# Altium PCB ECE453_PWR.PcbDoc
Units mm, origin at the board's own origin, x right, y up, seen from the top; angles counter-clockwise.
Board outline 41.25 x 71.25 mm, 2 copper layers (Top Layer, Bottom Layer); 34 components, 18 nets, 90 pads, 9 vias.
Unrouted connection lines stored in the file: 68.
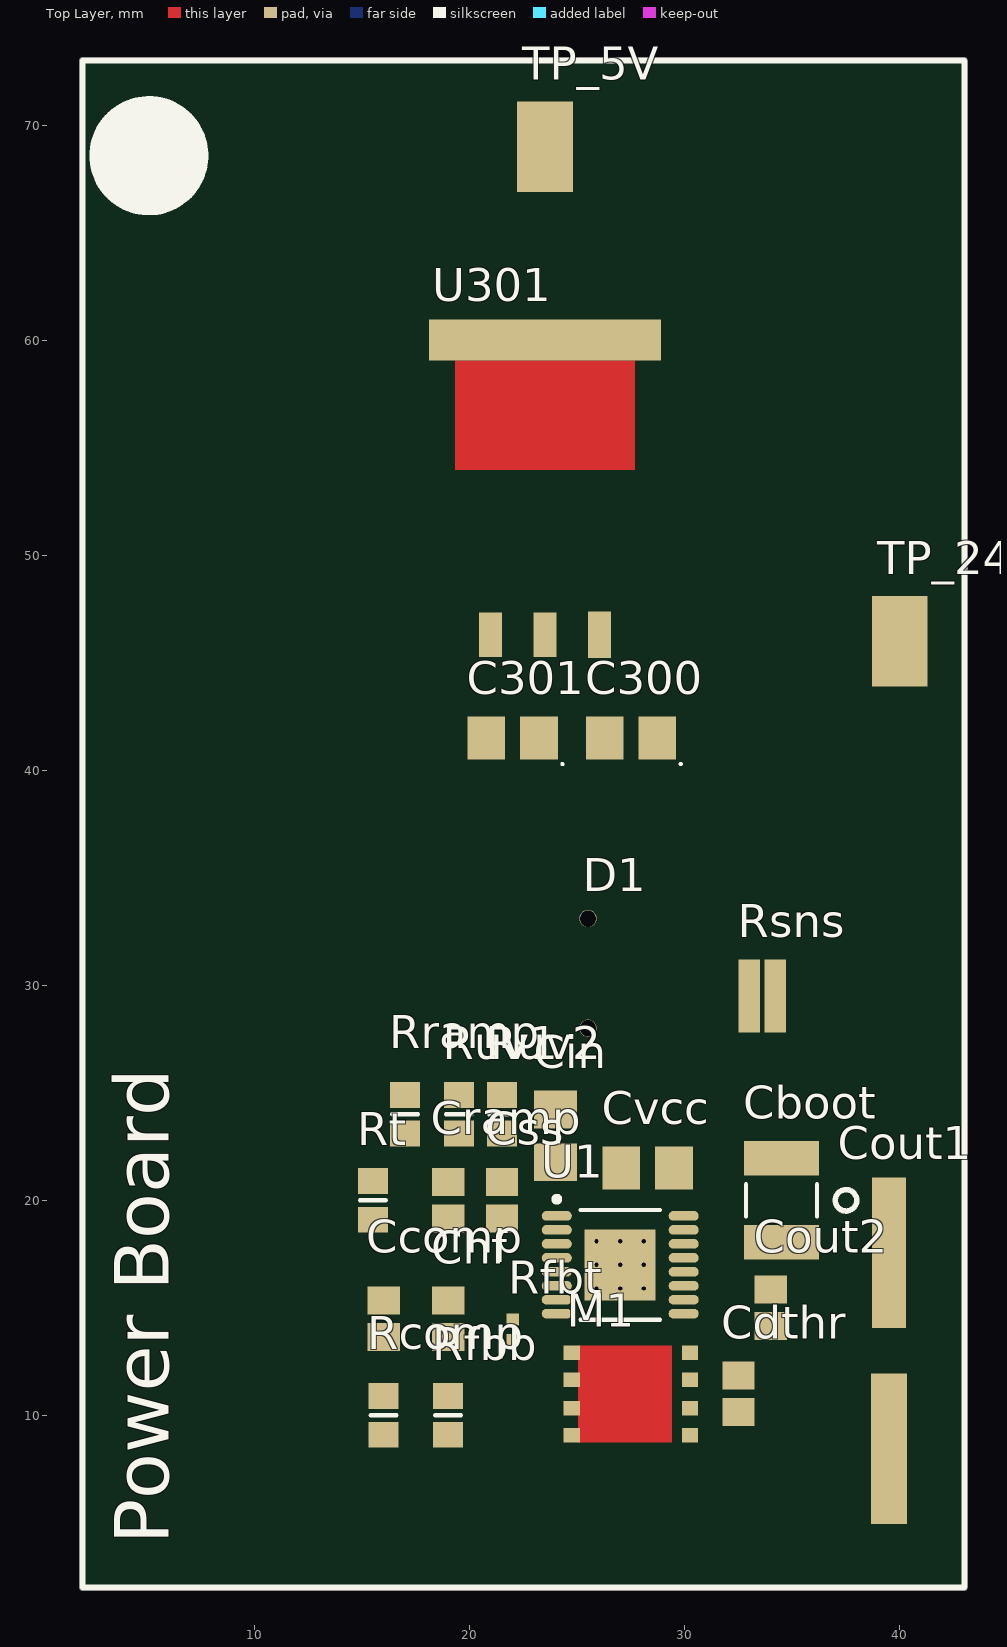
[diagram p0: Top Layer view]
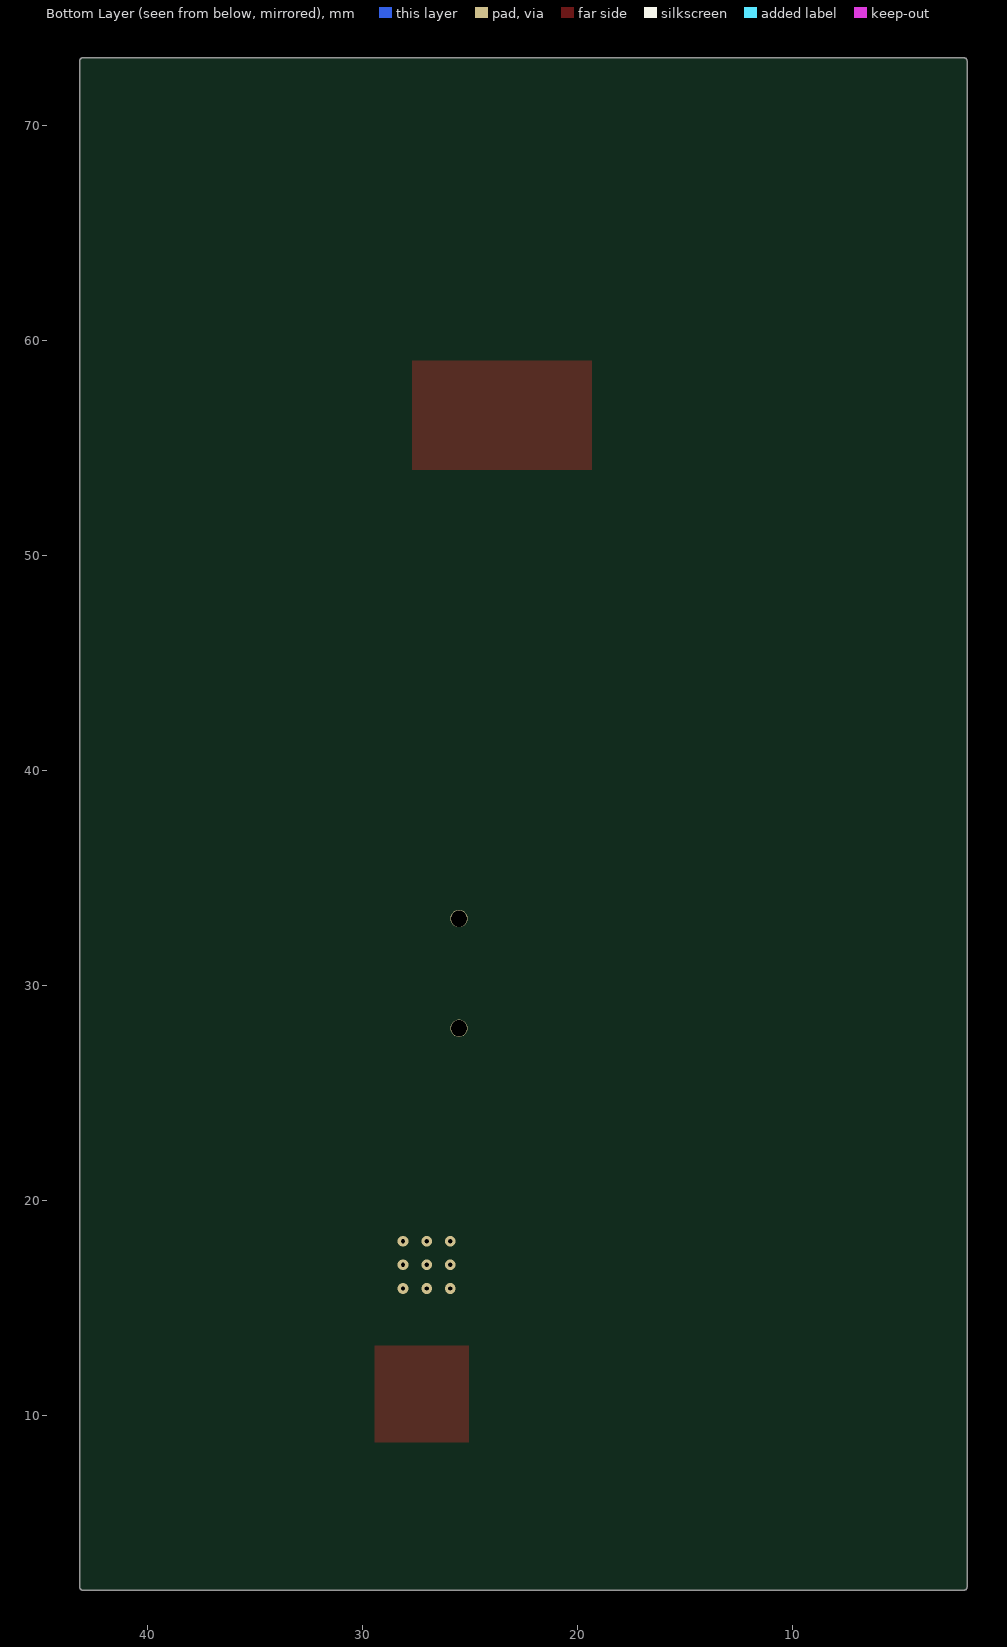
[diagram p1: Bottom Layer view, seen from below]

## Layer stack, top to bottom
Top Solder: solder mask 0.0102, Solder Resist, Dk 3.5
Top Layer: signal copper 0.0356
Dielectric1: dielectric 0.32, FR-4, Dk 4.8
Bottom Layer: signal copper 0.0356
Bottom Solder: solder mask 0.0102, Solder Resist, Dk 3.5

## Board outline
1.873,2 ccw(c2,2) 2,1.873 43,1.873 ccw(c43,2) 43.127,2 43.127,73 ccw(c43,73) 43,73.127 2,73.127 ccw(c2,73) 1.873,73

## Design rules (kind name [scope] priority, off if disabled: settings)
Clearance Polygon_Clearance [All vs InPolygon] p1: gap=0.508 ignorepadtopadclearanceinfootprint=FALSE except(0: Arc-Hole Track-Hole SMDPad-Hole THPad-Hole Via-Hole Fill-Hole Poly-Hole Region-Hole Text-Hole)
Clearance [All] p2: gap=0.2 ignorepadtopadclearanceinfootprint=FALSE except(0: Arc-Hole Track-Hole SMDPad-Hole THPad-Hole Via-Hole Fill-Hole Poly-Hole Region-Hole Text-Hole)
ComponentClearance [InComponent('U3')] p1: gap=0 collisioncheckmode=3 verticalgap=0.254 showdistances=FALSE
Height [All] p1: minheight=0 maxheight=22 prefheight=12.7
HoleSize [All] p1: absolutevalues=TRUE maxlimit=6.35 minlimit=0.03 maxpercent=80.000 minpercent=20.000
MinimumSolderMaskSliver [All] p1: minsoldermaskwidth=0.178
NetAntennae NetAntennae_5.0V [InNet('5.0V')] p1: netantennaetolerance=0
NetAntennae NetAntennae_3.3V [InNet('3.3V')] p2: netantennaetolerance=0
PolygonConnect [IsNamedPolygon('5.0V_L01_P047') vs IsVia] p1: connectstyle=Relief reliefconductorwidth=0.254 reliefentries=4 polygonreliefangle="90 Angle" airgapwidth=0.254
PolygonConnect PolygonConnect_1 [All] p2: connectstyle=Relief reliefconductorwidth=0.254 reliefentries=4 polygonreliefangle="90 Angle" airgapwidth=0.254
RoutingVias [All] p1: holewidth=0.711 width=1.27 viastyle="Through Hole" minholewidth=0.381 minwidth=0.635 maxholewidth=0.711 maxwidth=1.27
SilkToSolderMaskClearance [IsPad] p1: minsilkscreentomaskgap=0.152 clearancetoexposedcopper=TRUE
SolderMaskExpansion [All] p1: expansion=0.102
Width [All] p1: maxlimit=12 minlimit=0.1 preferedwidth=0.254 minimp=50.000000 maximp=50.000000 favimp=50.000000
24 further rules are at their usual default settings.

## Classes and differential pairs
component class "03 24V-5V": C300 C301 J301_5V J302_5V J303_5V TP_5V TP_24V U301

## Components (designator, comment, footprint, x,y, rotation, side; value= is the part's Value field where it differs from the comment)
C300 "CAP_10uF_TANT" CAP_1207_POL 27.5,41.5 r180 top
C301 "CAP_10uF_TANT" CAP_1207_POL 22,41.5 r180 top
Cboot "CAP_27nF" CAP_1812 34.5,20 r270 top value=Value
Ccomp "CAP_1nF" CAP_0805 16,14.5 r90 top value=Value
Cdthr "CAP_100nF" CAP_0805 32.5,11 r270 top value=Value
Chf "CAP_22pF" CAP_0805 19,14.5 r90 top value=Value
Cin "CAP_1uF" CAP_1207 24,23 r90 top value=Value
Cout1 "PCAP_22uF" CAP_RAD_35SVPF22M 39.5,13 r90 top value=Value
Cout2 "CAP_2.2uF" CAP_0805 34,15 r90 top value=Value
Cramp "CAP_620pF" CAP_0805 19,20 r90 top value=Value
Css "CAP_8.2nF" CAP_0805 21.5,20 r90 top
Cvcc "CAP_680nF" CAP_1207 28.275,21.5 r180 top value=Value
D1 "DIO_SCHOTT_1655-1099-ND" DIO_SCHOTT_MBRF10200 25.5,30.55 r90 top
J201_56V "TERMINAL_SCREW_2x1" TERM_2PIN -24.5,-82.5 r90 top
J202_24V "TERMINAL_SCREW_2x1" TERM_2PIN -1,-82.735 r90 top
J203_24V "TERMINAL_SCREW_2x1" TERM_2PIN -16.5,-54.735 r90 top
J204_24V "TERMINAL_SCREW_2x1" TERM_2PIN -2,-54 r90 top
J301_5V "TERMINAL_SCREW_2x1" TERM_2PIN 112,48 r90 top
J302_5V "TERMINAL_SCREW_2x1" TERM_2PIN 88,57.265 r90 top
J303_5V "TERMINAL_SCREW_2x1" TERM_2PIN 62,55.765 r90 top
L1 "IND_10uH" IND_SER2900 80,-62.5 r270 top value=Value
M1 "MOS_CSD19534Q5A" MOS_CSD19534Q5A 27.5,11 r0 top value=Value
Rcomp "RES_56.2K" RES_0805 16,10 r90 top value=Value
Rfbb "RES_1.69K" RES_0805 19,10 r270 top value=Value
Rfbt "RES_32K" RES_0402 22,13.975 r90 top
Rramp "RES_73.2K" RES_0805 17,24 r270 top value=Value
Rsns "RES_8m" RES_1206 33.6,29.5 r0 top value=Value
Rt "RES_10.7K" RES_0805 15.5,20 r90 top value=Value
Ruv1 "RES_1.37K" RES_0805 19.5,24 r90 top value=Value
Ruv2 "RES_49.9K" RES_0805 21.5,24 r270 top value=Value
TP_5V "TP_1206" TP-SMC-1206 23.5,69 r90 top
TP_24V "TP_1206" TP-SMC-1206 40,46 r90 top
U1 "BUCK_LM5088QMHX-1/NOP" BUCK_LM5088 27,17 r0 top value=Value
U301 "BUCK_LM1084IS-5.0" BUCK_5V_OUT_FIXED 23.5,53.33 r270 top

## Footprints (in the part's own frame and the unit in brackets; to place one, negate y for a bottom-side part, rotate by r counter-clockwise, add the part's x,y. Pads: shape width x height; smd on the part's side, far side on the other; paste and mask are expansions set on the pad)
BUCK_5V_OUT_FIXED [mm]
  rect 2.06x1.07 smd: 1(7.025,-2.54) 2(7.025,0)
  rect 1.91x10.8 smd: 2(-6.67,0)
  rect 2.16x1.07 smd: 3(7.025,2.54)
  Top Layer region: -5.715,-4.165 -0.635,-4.165 -0.635,4.165 -5.715,4.165
BUCK_LM5088 [mm] "TSOP, 16-Leads, Body 5.00x4.40mm, Pitch 0.65mm, Thermal Pad 3.30x3.30mm, IPC Medium Density"
  oval 1.4x0.45 smd: 1(-2.95,2.275) 2(-2.95,1.625) 3(-2.95,0.975) 4(-2.95,0.325) 5(-2.95,-0.325) 6(-2.95,-0.975) 7(-2.95,-1.625) 8(-2.95,-2.275) 9(2.95,-2.275) 10(2.95,-1.625) 11(2.95,-0.975) 12(2.95,-0.325) 13(2.95,0.325) 14(2.95,0.975) 15(2.95,1.625) 16(2.95,2.275)
  rect 3.3x3.3 smd: 17(0,0)
  silkscreen extent -3.07,-2.55 1.85,3.17, body extent -2.25,-2.55 2.25,2.55, height 1.2
CAP_0805 [mm]
  rect 1.3x1.5 smd: 1(-0.85,0) 2(0.85,0)
  body extent -1.1,-0.72 1.1,0.72, height 1.1
CAP_1207 [mm] "Chip Capacitor, 2-Leads, Body 3.20x1.70mm, IPC Medium Density"
  rect 1.75x2 smd: 1(-1.225,0) 2(1.225,0)
  body extent -1.75,-1 1.75,1, height 1.6
CAP_1207_POL [mm] "Chip Capacitor, 2-Leads, Body 3.20x1.70mm, IPC Medium Density"
  rect 1.75x2 smd: 1(-1.225,0) 2(1.225,0)
  silkscreen extent -2.36,1.16 -2.26,1.26, body extent -1.75,-1 1.75,1, height 1.6
CAP_1812 [mm] "Chip Capacitor, 2-Leads, Body 4.50x3.20mm, IPC Medium Density"
  rect 1.6x3.5 smd: 1(-1.95,0) 2(1.95,0)
  silkscreen extent -0.75,-1.65 0.75,1.65, body extent -2.4,-1.75 2.4,1.75, height 1.1
CAP_RAD_35SVPF22M [mm]
  rect 7x1.6 smd: 1(4.55,0)
  rect 7x1.66 smd: 2(-4.55,0)
  silkscreen extent 6.5,1.5 7.5,2.5
DIO_SCHOTT_MBRF10200 [mm]
  round 0.8 hole 0.762: 1(-2.55,0) 2(2.55,0)
IND_SER2900 [mm]
  rect 5.33x5.59 smd: 1(-5.075,-14.355)
  rect 5.59x5.33 smd: 2(5.075,-14.355)
  rect 6.35x5.28 smd: 3(0,7.72)
MOS_CSD19534Q5A [mm]
  rect 0.75x0.675 smd: 1(2.753,-1.918) 2(2.753,-0.66) 3(2.753,0.66) 4(2.753,1.918) 5(-2.753,1.918) 6(-2.753,0.66) 7(-2.753,-0.66) 8(-2.753,-1.918)
  Top Layer region: -2.473,-2.255 1.918,-2.255 1.918,2.255 -2.473,2.255
RES_0402 [mm] "Chip Resistor, 2-Leads, Body 1.02x0.52mm, IPC Medium Density"
  rect 0.55x0.6 smd: 1(-0.475,0) 2(0.475,0)
  body extent -0.53,-0.28 0.53,0.27, height 0.4
RES_0805 [mm] "Chip Resistor, Body 2.0x1.3mm, IPC Medium Density"
  rect 1.2x1.4 smd: 1(-0.9,0) 2(0.9,0)
  silkscreen extent 0,-0.6 0,0.6, body extent -1.07,-0.7 1.07,0.7, height 0.65
RES_1206 [mm] "Chip Resistor, 2-Leads, Body 1.60x3.20mm, IPC Medium Density"
  rect 1x3.4 smd: 1(-0.6,0) 2(0.6,0)
  body extent -0.9,-1.7 0.9,1.7, height 0.6
TERM_2PIN [mm]
  round 0.9 hole 0.762: 1(4.765,0) 2(-4.765,0)
TP-SMC-1206 [mm] "Surface mount test point 1206"
  rect 4.2x2.6 smd mask+0: 1(0,0)
  body extent -1.57,-0.79 1.63,0.81, height 1.22

## Part data
C300 C301: Capacitance=10uF, ESR (Equivalent Series Resistance)="2 Ohm", Lifetime @ Temp.=-, Manufacturer="AVX Corporation", Manufacturer Part Number=F951E106MAAAQ2, Manufacturer Size Code=A, Operating Temperature="-55°C ~ 125°C", Package / Case="1206 (3216 Metric)", Supplier Part Number 1=478-8496-1-ND, Tolerance=±20%, Category=Capacitors, ComponentLink1Description=http://datasheets.avx.com/F95.pdf, ComponentLink1URL=http://datasheets.avx.com/F95.pdf, Failure Rate=-, Features="General Purpose", Height - Seated (Max)="0.063\" (1.60mm)", Lead Spacing=-, Mounting Type="Surface Mount", Notification="Current market demand for these product types have resulted in fluctuating and extending lead times. Lead times may differ.", Packaging="Cut Tape (CT)", Part Status=Active, Pricing 1="1=1.01, 10=0.766, 100=0.5477, 500=0.42406, 1000=0.36516 (USD)", RoHS="RoHS Compliant", Size / Dimension="0.126\" L x 0.067\" W (3.20mm x 1.70mm)", Stock 1=23690, Supplier 1=Digi-Key, TYPE="Conformal Coated"
Cboot: "Imported", Capacitance=27nF, Manufacturer=KEMET, Manufacturer_Name=Kemet, Manufacturer_Part_Number=C1812C273J5GACTU, Operating Temperature="-55°C ~ 125°C", Package / Case="1812 (4532 Metric)", Ratings=-, Supplier Part Number 1=399-5352-1-ND, Temperature Coefficient="C0G, NP0", Tolerance=±5%, Voltage - Rated=50V, Applications="General Purpose", Category=Capacitors, ComponentLink1Description=https://search.kemet.com/component-edge/download/datasheet/C1812C273J5GACTU.pdf, ComponentLink1URL=https://search.kemet.com/component-edge/download/datasheet/C1812C273J5GACTU.pdf, Failure Rate=-, Features="Low ESL", Height - Seated (Max)=-, Lead Spacing=-, Lead Style=-, Manufacturer Part Number=C1812C273J5GACTU, Mounting Type="Surface Mount, MLCC", Notification="Current market demand for these product types have resulted in fluctuating and extending lead times. Lead times may differ.", Packaging="Cut Tape (CT)", Part Status=Active, Pricing 1="1=1.94, 10=1.533, 100=1.1499, 500=0.8688 (USD)", RefDes=RefDes, RoHS="RoHS Compliant", Size / Dimension="0.177\" L x 0.126\" W (4.50mm x 3.20mm)", Stock 1=1884, Supplier 1=Digi-Key, Thickness (Max)="0.043\" (1.10mm)", TYPE=TYPE, Vendor=Kemet
Ccomp: "Imported", Capacitance=1nF, Manufacturer=KEMET, Manufacturer_Name=Kemet, Manufacturer_Part_Number=C0805C102K5GACTU, Operating Temperature="-55°C ~ 125°C", Package / Case="0805 (2012 Metric)", Ratings=-, Supplier Part Number 1=399-7988-1-ND, Temperature Coefficient="C0G, NP0", Tolerance=±10%, Voltage - Rated=50V, Applications="General Purpose", Category=Capacitors, ComponentLink1Description=https://search.kemet.com/component-edge/download/datasheet/C0805C102K5GACTU.pdf, ComponentLink1URL=https://search.kemet.com/component-edge/download/datasheet/C0805C102K5GACTU.pdf, Failure Rate=-, Features="Low ESL", Height - Seated (Max)=-, Lead Spacing=-, Lead Style=-, Manufacturer Part Number=C0805C102K5GACTU, Mounting Type="Surface Mount, MLCC", Notification="Current market demand for these product types have resulted in fluctuating and extending lead times. Lead times may differ.", Packaging="Cut Tape (CT)", Part Status=Active, Pricing 1="1=0.13, 10=0.09, 100=0.0424, 500=0.02972, 1000=0.02461 (USD)", RefDes=RefDes, RoHS="RoHS Compliant", Size / Dimension="0.079\" L x 0.049\" W (2.00mm x 1.25mm)", Stock 1=31421, Supplier 1=Digi-Key, Thickness (Max)="0.035\" (0.88mm)", TYPE=TYPE, Vendor=Kemet
Cdthr: "Imported", Capacitance=100nF, Manufacturer="AVX Corporation", Manufacturer_Name=AVX, Manufacturer_Part_Number=08053C104JAZ2A, Operating Temperature="-55°C ~ 125°C", Package / Case="0805 (2012 Metric)", Ratings=-, Supplier Part Number 1=08053C104JAZ2A-ND, Temperature Coefficient=X7R, Tolerance=±5%, Voltage - Rated=25V, Applications="Boardflex Sensitive", Category=Capacitors, ComponentLink1Description=http://datasheets.avx.com/FlexitermMLCC.pdf, ComponentLink1URL=http://datasheets.avx.com/FlexitermMLCC.pdf, Features="Soft Termination", Height - Seated (Max)=-, Lead Spacing=-, Lead Style=-, Manufacturer Part Number=08053C104JAZ2A, Mounting Type="Surface Mount, MLCC", Notification="Current market demand for these product types have resulted in fluctuating and extending lead times. Lead times may differ.", Packaging="Tape & Reel (TR)", Part Status=Active, Pricing 1="4000=0.0864 (USD)", RefDes=RefDes, RoHS="RoHS Compliant", Size / Dimension="0.079\" L x 0.049\" W (2.01mm x 1.25mm)", Stock 1=0, Supplier 1=Digi-Key, Thickness (Max)="0.037\" (0.94mm)", TYPE=TYPE, Vendor=AVX
Chf: "Imported", Capacitance=22pF, Manufacturer=KEMET, Manufacturer_Name=Kemet, Manufacturer_Part_Number=C0805C220K3GACTU, Operating Temperature="-55°C ~ 125°C", Package / Case="0805 (2012 Metric)", Ratings=-, Supplier Part Number 1=399-9190-1-ND, Temperature Coefficient="C0G, NP0", Tolerance=±10%, Voltage - Rated=25V, Applications="General Purpose", Category=Capacitors, ComponentLink1Description=https://search.kemet.com/component-edge/download/datasheet/C0805C220K3GACTU.pdf, ComponentLink1URL=https://search.kemet.com/component-edge/download/datasheet/C0805C220K3GACTU.pdf, Failure Rate=-, Features="Low ESL", Height - Seated (Max)=-, Lead Spacing=-, Lead Style=-, Manufacturer Part Number=C0805C220K3GACTU, Mounting Type="Surface Mount, MLCC", Notification="Current market demand for these product types have resulted in fluctuating and extending lead times. Lead times may differ.", Packaging="Cut Tape (CT)", Part Status=Active, Pricing 1="1=0.1, 10=0.072, 100=0.0322, 500=0.02302, 1000=0.01809 (USD)", RefDes=RefDes, RoHS="RoHS Compliant", Size / Dimension="0.079\" L x 0.049\" W (2.00mm x 1.25mm)", Stock 1=86290, Supplier 1=Digi-Key, Thickness (Max)="0.035\" (0.88mm)", TYPE=TYPE, Vendor=Kemet
Cin: "Imported", Capacitance=1uF, Manufacturer="TDK Corporation", Manufacturer_Name=TDK, Manufacturer_Part_Number=C3216X7R2A105K160AA, Operating Temperature="-55°C ~ 125°C", Package / Case="1206 (3216 Metric)", Ratings=-, Supplier Part Number 1=445-4467-1-ND, Temperature Coefficient=X7R, Tolerance=±10%, Voltage - Rated=100V, Applications="General Purpose", Category=Capacitors, ComponentLink1Description=https://product.tdk.com/info/en/catalog/datasheets/mlcc_commercial_midvoltage_en.pdf, ComponentLink1URL=https://product.tdk.com/info/en/catalog/datasheets/mlcc_commercial_midvoltage_en.pdf, Failure Rate=-, Features=-, Height - Seated (Max)=-, Lead Spacing=-, Lead Style=-, Manufacturer Part Number=C3216X7R2A105K160AA, Mounting Type="Surface Mount, MLCC", Notification="Current market demand for these product types have resulted in fluctuating and extending lead times. Lead times may differ.", Packaging="Cut Tape (CT)", Part Status=Active, Pricing 1="1=0.45, 10=0.316, 100=0.2083, 500=0.15434, 1000=0.13118 (USD)", RefDes=RefDes, RoHS="RoHS Compliant", Size / Dimension="0.126\" L x 0.063\" W (3.20mm x 1.60mm)", Stock 1=15982, Supplier 1=Digi-Key, Thickness (Max)="0.051\" (1.30mm)", TYPE=TYPE, Vendor=TDK
Cout1: "Imported", Capacitance=22uF, ESR (Equivalent Series Resistance)="35 mOhm", Lifetime @ Temp.="5000 Hrs @ 105°C", Manufacturer="Panasonic Electronic Components", Manufacturer_Name=Panasonic, Manufacturer_Part_Number=35SVPF22M, Operating Temperature="-55°C ~ 105°C", Package / Case="Radial, Can - SMD", Ratings=-, Supplier Part Number 1=P16560CT-ND, Tolerance=±20%, Applications="General Purpose", Category=Capacitors, ComponentLink1Description=http://industrial.panasonic.com/www-cgi/jvcr13pz.cgi?E+CI+4+AAB8001+35SVPF22M+8+WW, ComponentLink1URL=http://industrial.panasonic.com/www-cgi/jvcr13pz.cgi?E+CI+4+AAB8001+35SVPF22M+8+WW, Height - Seated (Max)="0.236\" (6.00mm)", Lead Spacing=-, Manufacturer Part Number=35SVPF22M, Mounting Type="Surface Mount", Packaging="Cut Tape (CT)", Part Status=Active, Pricing 1="1=1.32, 10=1.041, 100=0.7811, 500=0.59018 (USD)", RefDes=RefDes, RoHS="RoHS Compliant", Size / Dimension="0.248\" Dia (6.30mm)", Stock 1=16325, Supplier 1=Digi-Key, Surface Mount Land Size="0.260\" L x 0.260\" W (6.60mm x 6.60mm)", TYPE=TYPE, Vendor=Panasonic
Cout2: "Imported", Capacitance=2.2uF, Manufacturer="TDK Corporation", Manufacturer_Name=TDK, Manufacturer_Part_Number=C2012X7R1H225K125AC, Operating Temperature="-55°C ~ 125°C", Package / Case="0805 (2012 Metric)", Ratings=-, Supplier Part Number 1=445-5968-1-ND, Temperature Coefficient=X7R, Tolerance=±10%, Voltage - Rated=50V, Applications="General Purpose", Category=Capacitors, ComponentLink1Description=https://product.tdk.com/info/en/catalog/datasheets/mlcc_commercial_general_en.pdf, ComponentLink1URL=https://product.tdk.com/info/en/catalog/datasheets/mlcc_commercial_general_en.pdf, Failure Rate=-, Features="Low ESL", Height - Seated (Max)=-, Lead Spacing=-, Lead Style=-, Manufacturer Part Number=C2012X7R1H225K125AC, Mounting Type="Surface Mount, MLCC", Notification="Current market demand for these product types have resulted in fluctuating and extending lead times. Lead times may differ.", Packaging="Cut Tape (CT)", Part Status=Active, Pricing 1="1=0.51, 10=0.351, 100=0.2107, 500=0.158, 1000=0.13343 (USD)", RefDes=RefDes, RoHS="RoHS Compliant", Size / Dimension="0.079\" L x 0.049\" W (2.00mm x 1.25mm)", Stock 1=64990, Supplier 1=Digi-Key, Thickness (Max)="0.057\" (1.45mm)", TYPE=TYPE, Vendor=TDK
Cramp: "Imported", Capacitance=620pF, Manufacturer="Samsung Electro-Mechanics", Manufacturer_Part_Number=CL21C621JBCNNNC, Operating Temperature="-55°C ~ 125°C", Package / Case="0805 (2012 Metric)", Ratings=-, Supplier Part Number 1=1276-2677-1-ND, Temperature Coefficient="C0G, NP0", Tolerance=±5%, Voltage - Rated=50V, Applications="General Purpose", Category=Capacitors, ComponentLink1Description=http://www.samsungsem.com/kr/support/product-search/mlcc/CL21C621JBCNNNC.jsp, ComponentLink1URL=http://www.samsungsem.com/kr/support/product-search/mlcc/CL21C621JBCNNNC.jsp, Features=-, Height - Seated (Max)=-, Lead Spacing=-, Lead Style=-, Manufacturer_Name="Samsung Electro-Mechanics", Manufacturer Part Number=CL21C621JBCNNNC, Mounting Type="Surface Mount, MLCC", Notification="Current market demand for these product types have resulted in fluctuating and extending lead times. Lead times may differ.", Packaging="Cut Tape (CT)", Part Status=Active, Pricing 1="1=0.1, 10=0.066, 100=0.0293, 500=0.0209, 1000=0.01643 (USD)", RefDes=RefDes, RoHS="RoHS Compliant", Size / Dimension="0.079\" L x 0.049\" W (2.00mm x 1.25mm)", Stock 1=14370, Supplier 1=Digi-Key, Thickness (Max)="0.037\" (0.95mm)", TYPE=TYPE, Vendor="Samsung Electro-Mechanics"
Css: "Imported", Capacitance=8.2nF, Manufacturer="Murata Electronics North America", Manufacturer Part Number=GRM2195C1H822JA01D, Operating Temperature="-55°C ~ 125°C", Package / Case="0805 (2012 Metric)", Ratings=-, Supplier Part Number 1=490-1640-1-ND, Temperature Coefficient="C0G, NP0", Tolerance=±5%, Voltage - Rated=50V, Applications="General Purpose", Category=Capacitors, ComponentLink1Description=https://www.murata.com/~/media/webrenewal/support/library/catalog/products/capacitor/mlcc/c02e.ashx, ComponentLink1URL=https://www.murata.com/~/media/webrenewal/support/library/catalog/products/capacitor/mlcc/c02e.ashx, Features=-, Height - Seated (Max)=-, Lead Spacing=-, Lead Style=-, Mounting Type="Surface Mount, MLCC", Notification="Current market demand for these product types have resulted in fluctuating and extending lead times. Lead times may differ.", Packaging="Cut Tape (CT)", Part Status=Active, Pricing 1="1=0.24, 10=0.167, 100=0.0948, 500=0.06696, 1000=0.05858 (USD)", RoHS="RoHS Compliant", Size / Dimension="0.079\" L x 0.049\" W (2.00mm x 1.25mm)", Stock 1=52724, Supplier 1=Digi-Key, Thickness (Max)="0.037\" (0.95mm)"
Cvcc: "Imported", Capacitance=680nF, Dielectric Material="Acrylic, Metallized - Stacked", Manufacturer="Panasonic Electronic Components", Manufacturer_Name=Panasonic, Manufacturer_Part_Number=ECPU1C684MA5, Manufacturer Part Number=ECP-U1C684MA5, Operating Temperature="-40°C ~ 85°C", Package / Case="1206 (3216 Metric)", Ratings=-, Supplier Part Number 1=PCF1131CT-ND, Tolerance=±20%, Voltage Rating - DC=16V, Applications="EMI, RFI Suppression", Category=Capacitors, ComponentLink1Description=http://industrial.panasonic.com/www-cgi/jvcr13pz.cgi?E+PZ+3+ABD0012+ECPU1C684MA5+7+WW, ComponentLink1URL=http://industrial.panasonic.com/www-cgi/jvcr13pz.cgi?E+PZ+3+ABD0012+ECPU1C684MA5+7+WW, Features="Low ESR", Height - Seated (Max)="0.063\" (1.60mm)", Lead Spacing=-, Mounting Type="Surface Mount", Packaging="Cut Tape (CT)", Part Status=Active, Pricing 1="1=0.81, 10=0.599, 100=0.4104, 500=0.32492, 1000=0.27362 (USD)", RefDes=RefDes, RoHS="RoHS Compliant", Size / Dimension="0.126\" L x 0.063\" W (3.20mm x 1.60mm)", Stock 1=39663, Supplier 1=Digi-Key, Termination="Solder Pads", TYPE=TYPE, Vendor=Panasonic, Voltage Rating - AC=-
D1: "Imported", Capacitance @ Vr, F=-, Current - Average Rectified (Io)=10A, Manufacturer="SMC Diode Solutions", Manufacturer Part Number=MBRF10200, Operating Temperature - Junction="-55°C ~ 175°C", Package / Case="TO-220-2 Insulated, TO-220AC", Supplier Device Package=ITO-220AC, Supplier Part Number 1=1655-1099-ND, Category="Discrete Semiconductor Products", ComponentLink1Description=http://www.smc-diodes.com/propdf/MBRF10200%20N0838%20REV.B.pdf, ComponentLink1URL=http://www.smc-diodes.com/propdf/MBRF10200%20N0838%20REV.B.pdf, Diode Type=Schottky, Mounting Type="Through Hole", Packaging=Tube, Part Status=Active, Pricing 1="1=0.62, 10=0.524, 25=0.4584, 100=0.3928, 250=0.34044, 500=0.28806, 1000=0.22259, 2500=0.20295, 5000=0.18986 (USD)", RoHS="RoHS Compliant", Speed="Fast Recovery =< 500ns, > 200mA (Io)", Stock 1=0, Supplier 1=Digi-Key
J201_56V J202_24V J203_24V J204_24V J301_5V J302_5V J303_5V: "TERM BLOCK PLUG 2POS STR 5.08MM", Color=Green, Current - IEC=20A, Manufacturer="On Shore Technology Inc.", Manufacturer Part Number=OSTTJ025153, Material Flammability Rating="UL94 V-0", Operating Temperature="-30°C ~ 105°C", Supplier Part Number 1=WM13946-ND, Category="Connectors, Interconnects", Clamp Material - Plating="Copper - Nickel Plated", ComponentLink1Description=http://www.on-shore.com/wp-content/uploads/2015/09/osttjxx5153.pdf, ComponentLink1URL=http://www.on-shore.com/wp-content/uploads/2015/09/osttjxx5153.pdf, ComponentLink2Description=http://www.molex.com/pdm_docs/sd/393900102_sd.pdf, ComponentLink2URL=http://www.molex.com/pdm_docs/sd/393900102_sd.pdf, Contact Material=Brass, Contact Material - Plating="Copper - Tin Plated", Contact Mating Finish=Tin, Contact Tail Length=-, Features="Retention Latches (Non-Wire Side)", Header Orientation=-, Housing Material=Brass, Ingress Protection=-, Insulation Height=-, Mating Orientation="Horizontal with Board", Mounting Type=Screw, Number of Levels=1, Number of Positions=2, Packaging=Bulk, Part Status=Active, Pitch="0.200\" (5.08mm)", Plug Wire Entry=-, Positions Per Level=2, Pricing 1="1=1.52, 10=1.068, 25=0.996, 50=0.904, 100=0.9, 250=0.76, 500=0.72, 1000=0.64, 5000=0.52 (USD)", RoHS="RoHS Compliant", Screw Material - Plating="Copper - Nickel Plated", Screw Size=-, Screw Thread=-, Stock 1=1303, Supplier 1=Digi-Key, Termination Style=Screw, Torque - Screw="0.56 Nm (5.0 Lb-In)", TYPE="Plug, Female Sockets", Wire Gauge="10-30 AWG", Wire Gauge or Range - AWG="12-24 AWG", Wire Gauge or Range - mm²=0.34-2.5mm², Wire Strip Length=7-8mm, Wire Termination=Screw
L1: "Imported", DC Resistance Max=1650, Inductance=10uH, Inductance Tolerance="± 10%", Inductor Construction=Shielded, Manufacturer=COILCRAFT, Manufacturer_Name=Coilcraft, Manufacturer_Part_Number=SER2915L-103KL, Power Inductor Case="27.9mm x 19.8mm x 15.36", RMS Current (Irms)=30, Saturation Current (Isat)=13, Self Resonant Frequency Min="20MHz<!--FANDB--><div class=\"features-and-benefits-container\"><div class=\"features-and-benefits-description\"><span class=\"features-benefits-value\">The SER2915L-103KL is a surface mount shielded Power Inductor with ferrite core. This inductor features tin-silver over copper terminations and is resistance to soldering heat maximum three 40 seconds reflows at +260°C, parts cooled to room temperature between cycles. This inductor also features moisture sensitivity level (MSL) of 1, failures in time (FIT)/mean time between failures (MTBF) is 38 per billion hours/26,315,789 hours, calculated per Telcordia SR-332 and tested with pure water or alcohol only foe wash. Peak dc current at which the inductance drops the specified amount from its value without current and inductance measured at 500kHz, 0.1Vrms, 0ADC on an Agilent/HP 4284", Supplier Part Number 1=2288908, Automotive Qualification Standard=AEC-Q200, ComponentLink1Description=http://www.farnell.com/datasheets/1681984.pdf, ComponentLink1URL=http://www.farnell.com/datasheets/1681984.pdf, Manufacturer Part Number=SER2915L-103KL, Packaging=Each, Product Range="SER2900 Series", RefDes=RefDes, RoHS=YES, Supplier 1=Farnell, SVHC="No SVHC (12-Jan-2017)", TYPE=TYPE, Vendor=Coilcraft
M1: "Imported", Current - Continuous Drain (Id) @ 25°C="50A (Ta)", Drive Voltage (Max Rds On,  Min Rds On)="6V, 10V", Manufacturer="Texas Instruments", Manufacturer_Part_Number=CSD19534Q5A, Operating Temperature="-55°C ~ 150°C (TJ)", Package / Case=8-PowerTDFN, Power Dissipation (Max)="3.2W (Ta), 63W (Tc)", Supplier Device Package="8-VSON (5x6)", Supplier Part Number 1=296-43636-1-ND, Category="Discrete Semiconductor Products", ComponentLink1Description=http://www.ti.com/lit/ds/symlink/csd19534q5a.pdf, ComponentLink1URL=http://www.ti.com/lit/ds/symlink/csd19534q5a.pdf, Datasheet_URL=http://www.ti.com/lit/ds/symlink/CSD19534Q5A.pdf, FET Feature=-, FET Type=N-Channel, IdsMax=10.0A, Manufacturer_Name="Texas Instruments", Manufacturer Part Number=CSD19534Q5A, Mounting Type="Surface Mount", Packaging="Cut Tape (CT)", Part Status=Active, Pricing 1="1=1.18, 10=1.043, 100=0.8244, 500=0.63936, 1000=0.50475 (USD)", QgTyp=17nC, Quantity=1, Rds On (Max) @ Id, Vgs="15.1 mOhm @ 10A, 10V", Rdsonat10V=0.012Ohm, RefDes=RefDes, RoHS="RoHS Compliant", Stock 1=307, Supplier 1=Digi-Key, Technology="MOSFET (Metal Oxide)", TYPE=TYPE, VdsMax=100.0V, Vendor="Texas Instruments", Vgs (Max)=±20V, Vgs(th) (Max) @ Id="3.4V @ 250µA"
Rcomp: "Imported", Manufacturer="Panasonic Electronic Components", Manufacturer_Name=Panasonic, Manufacturer_Part_Number=ERJ-6ENF5622V, Operating Temperature="-55°C ~ 155°C", Package / Case="0805 (2012 Metric)", Power (Watts)="0.125W, 1/8W", Supplier Device Package=0805, Supplier Part Number 1=P56.2KCCT-ND, Temperature Coefficient=±100ppm/°C, Tolerance=±1%, Category=Resistors, ComponentLink1Description=https://industrial.panasonic.com/cdbs/www-data/pdf/RDA0000/AOA0000C304.pdf, ComponentLink1URL=https://industrial.panasonic.com/cdbs/www-data/pdf/RDA0000/AOA0000C304.pdf, Composition="Thick Film", Failure Rate=-, Features="Automotive AEC-Q200", Height - Seated (Max)="0.028\" (0.70mm)", Manufacturer Part Number=ERJ-6ENF5622V, Packaging="Cut Tape (CT)", Part Status=Active, Pricing 1="1=0.1, 10=0.079, 100=0.0305, 1000=0.0134, 2500=0.01157 (USD)", RefDes=RefDes, RoHS="RoHS Compliant", Size / Dimension="0.079\" L x 0.049\" W (2.00mm x 1.25mm)", Stock 1=45392, Supplier 1=Digi-Key, TYPE=TYPE, Vendor=Panasonic
Rfbb: "Imported", Manufacturer="Panasonic Electronic Components", Manufacturer_Name=Panasonic, Manufacturer_Part_Number=ERJ-6ENF1691V, Operating Temperature="-55°C ~ 155°C", Package / Case="0805 (2012 Metric)", Power (Watts)="0.125W, 1/8W", Resistance=1.69K, Supplier Device Package=0805, Supplier Part Number 1=P1.69KCCT-ND, Temperature Coefficient=±100ppm/°C, Tolerance=±1%, Category=Resistors, ComponentLink1Description=https://industrial.panasonic.com/cdbs/www-data/pdf/RDA0000/AOA0000C304.pdf, ComponentLink1URL=https://industrial.panasonic.com/cdbs/www-data/pdf/RDA0000/AOA0000C304.pdf, Composition="Thick Film", Failure Rate=-, Features="Automotive AEC-Q200", Height - Seated (Max)="0.028\" (0.70mm)", Manufacturer Part Number=ERJ-6ENF1691V, Packaging="Cut Tape (CT)", Part Status=Active, Pricing 1="1=0.1, 10=0.079, 100=0.0305, 1000=0.0134, 2500=0.01157 (USD)", RefDes=RefDes, RoHS="RoHS Compliant", Size / Dimension="0.079\" L x 0.049\" W (2.00mm x 1.25mm)", Stock 1=49948, Supplier 1=Digi-Key, TYPE=TYPE, Vendor=Panasonic
Rfbt: "Imported", Manufacturer="Vishay Dale", Manufacturer Part Number=TNPW040232K0BEED, Operating Temperature="-55°C ~ 155°C", Package / Case="0402 (1005 Metric)", Power (Watts)="0.1W, 1/10W", Supplier Device Package=0402, Supplier Part Number 1=541-2115-1-ND, Temperature Coefficient=±25ppm/°C, Tolerance=±0.1%, Category=Resistors, ComponentLink1Description=http://www.vishay.com/docs/28758/tnpw_e3.pdf, ComponentLink1URL=http://www.vishay.com/docs/28758/tnpw_e3.pdf, Composition="Thin Film", Failure Rate=-, Features="Anti-Sulfur, Automotive AEC-Q200, Moisture Resistant", Height - Seated (Max)="0.016\" (0.40mm)", Packaging="Cut Tape (CT)", Part Status=Active, Pricing 1="1=0.65, 10=0.462, 100=0.2402, 1000=0.12936, 2500=0.1276 (USD)", RoHS="RoHS Compliant", Size / Dimension="0.039\" L x 0.020\" W (1.00mm x 0.50mm)", Stock 1=593, Supplier 1=Digi-Key
Rramp: "Imported", Manufacturer="Panasonic Electronic Components", Manufacturer_Name=Panasonic, Manufacturer_Part_Number=ERJ-6ENF7322V, Operating Temperature="-55°C ~ 155°C", Package / Case="0805 (2012 Metric)", Power (Watts)="0.125W, 1/8W", Supplier Device Package=0805, Supplier Part Number 1=P73.2KCCT-ND, Temperature Coefficient=±100ppm/°C, Tolerance=±1%, Category=Resistors, ComponentLink1Description=https://industrial.panasonic.com/cdbs/www-data/pdf/RDA0000/AOA0000C304.pdf, ComponentLink1URL=https://industrial.panasonic.com/cdbs/www-data/pdf/RDA0000/AOA0000C304.pdf, Composition="Thick Film", Failure Rate=-, Features="Automotive AEC-Q200", Height - Seated (Max)="0.028\" (0.70mm)", Manufacturer Part Number=ERJ-6ENF7322V, Packaging="Cut Tape (CT)", Part Status=Active, Pricing 1="1=0.1, 10=0.079, 100=0.0305, 1000=0.0134, 2500=0.01157 (USD)", RefDes=RefDes, RoHS="RoHS Compliant", Size / Dimension="0.079\" L x 0.049\" W (2.00mm x 1.25mm)", Stock 1=3056, Supplier 1=Digi-Key, TYPE=TYPE, Vendor=Panasonic
Rsns: "Imported", Manufacturer=Susumu, Manufacturer_Name="Susumu Co Ltd", Manufacturer_Part_Number=PRL1632-R008-F-T1, Operating Temperature="-55°C ~ 125°C", Package / Case="Wide 1206 (3216 Metric), 0612", Power (Watts)=1W, Supplier Device Package=1206, Supplier Part Number 1=PRL1632.008FCT-ND, Temperature Coefficient="0/ +350ppm/°C", Tolerance=±1%, Category=Resistors, ComponentLink1Description=http://www.susumu.co.jp/common/pdf/n_catalog_partition07_en.pdf, ComponentLink1URL=http://www.susumu.co.jp/common/pdf/n_catalog_partition07_en.pdf, Composition="Thin Film", Failure Rate=-, Features="Current Sense", Height - Seated (Max)="0.024\" (0.60mm)", Manufacturer Part Number=PRL1632-R008-F-T1, Packaging="Cut Tape (CT)", Part Status=Active, Pricing 1="1=0.65, 10=0.546, 25=0.4676, 50=0.421, 100=0.3664, 250=0.32744, 500=0.26508 (USD)", RefDes=RefDes, RoHS="RoHS Compliant", Size / Dimension="0.063\" L x 0.126\" W (1.60mm x 3.20mm)", Stock 1=11692, Supplier 1=Digi-Key, TYPE=TYPE, Vendor="Susumu Co Ltd"
Rt: "Imported", Manufacturer="Panasonic Electronic Components", Manufacturer_Name=Panasonic, Manufacturer_Part_Number=ERJ-6ENF1072V, Operating Temperature="-55°C ~ 155°C", Package / Case="0805 (2012 Metric)", Power (Watts)="0.125W, 1/8W", Supplier Device Package=0805, Supplier Part Number 1=P10.7KCCT-ND, Temperature Coefficient=±100ppm/°C, Tolerance=±1%, Category=Resistors, ComponentLink1Description=https://industrial.panasonic.com/cdbs/www-data/pdf/RDA0000/AOA0000C304.pdf, ComponentLink1URL=https://industrial.panasonic.com/cdbs/www-data/pdf/RDA0000/AOA0000C304.pdf, Composition="Thick Film", Failure Rate=-, Features="Automotive AEC-Q200", Height - Seated (Max)="0.028\" (0.70mm)", Manufacturer Part Number=ERJ-6ENF1072V, Packaging="Cut Tape (CT)", Part Status=Active, Pricing 1="1=0.1, 10=0.079, 100=0.0305, 1000=0.0134, 2500=0.01157 (USD)", RefDes=RefDes, RoHS="RoHS Compliant", Size / Dimension="0.079\" L x 0.049\" W (2.00mm x 1.25mm)", Stock 1=71566, Supplier 1=Digi-Key, TYPE=TYPE, Vendor=Panasonic
Ruv1: "Imported", Manufacturer="Vishay Dale", Manufacturer_Name=Vishay-Dale, Manufacturer_Part_Number=CRCW08051K37FKEA, Operating Temperature="-55°C ~ 155°C", Package / Case="0805 (2012 Metric)", Power (Watts)="0.125W, 1/8W", Resistance=1.37K, Supplier Device Package=0805, Supplier Part Number 1=541-1.37KCCT-ND, Temperature Coefficient=±100ppm/°C, Tolerance=±1%, Category=Resistors, ComponentLink1Description=http://www.vishay.com/docs/20035/dcrcwe3.pdf, ComponentLink1URL=http://www.vishay.com/docs/20035/dcrcwe3.pdf, Composition="Thick Film", Failure Rate=-, Features="Automotive AEC-Q200", Height - Seated (Max)="0.020\" (0.50mm)", Manufacturer Part Number=CRCW08051K37FKEA, Packaging="Cut Tape (CT)", Part Status=Active, Pricing 1="1=0.1, 10=0.055, 100=0.0223, 1000=0.01003, 2500=0.0087 (USD)", RefDes=RefDes, RoHS="RoHS Compliant", Size / Dimension="0.079\" L x 0.049\" W (2.00mm x 1.25mm)", Stock 1=34800, Supplier 1=Digi-Key, TYPE=TYPE, Vendor=Vishay-Dale
Ruv2: "Imported", Manufacturer="Panasonic Electronic Components", Manufacturer_Name=Panasonic, Manufacturer_Part_Number=ERJ-6ENF4992V, Operating Temperature="-55°C ~ 155°C", Package / Case="0805 (2012 Metric)", Power (Watts)="0.125W, 1/8W", Supplier Device Package=0805, Supplier Part Number 1=P49.9KCCT-ND, Temperature Coefficient=±100ppm/°C, Tolerance=±1%, Category=Resistors, ComponentLink1Description=https://industrial.panasonic.com/cdbs/www-data/pdf/RDA0000/AOA0000C304.pdf, ComponentLink1URL=https://industrial.panasonic.com/cdbs/www-data/pdf/RDA0000/AOA0000C304.pdf, Composition="Thick Film", Failure Rate=-, Features="Automotive AEC-Q200", Height - Seated (Max)="0.028\" (0.70mm)", Manufacturer Part Number=ERJ-6ENF4992V, Packaging="Cut Tape (CT)", Part Status=Active, Pricing 1="1=0.1, 10=0.079, 100=0.0305, 1000=0.0134, 2500=0.01157 (USD)", RefDes=RefDes, RoHS="RoHS Compliant", Size / Dimension="0.079\" L x 0.049\" W (2.00mm x 1.25mm)", Stock 1=218763, Supplier 1=Digi-Key, TYPE=TYPE, Vendor=Panasonic
TP_5V TP_24V: "Test Point SMD 1206", Case Size=1206, Manufacturer="TE Connectivity (Tyco Electronics)", Manufacturer Part Number=1625854-1, Operating Temperature="-55 to 125 C", Power Rating=N/R, Resistance Value="0 Ohm", Supplier Part Number 1=A106143CT-ND, ComponentLink1Description=https://datasheet.ciiva.com/6439/eng-ds-1773266-a-6439169.pdf, ComponentLink1URL=https://datasheet.ciiva.com/6439/eng-ds-1773266-a-6439169.pdf, ComponentLink2Description=https://datasheet.ciiva.com/30136/1773266-a-30136341.pdf, ComponentLink2URL=https://datasheet.ciiva.com/30136/1773266-a-30136341.pdf, ComponentLink3Description=https://datasheet.ciiva.com/6439/eng-ds-1773266-a-6439080.pdf, ComponentLink3URL=https://datasheet.ciiva.com/6439/eng-ds-1773266-a-6439080.pdf, ComponentLink4Description=https://datasheet.ciiva.com/6439/eng-ds-1773266-a-6439081.pdf, ComponentLink4URL=https://datasheet.ciiva.com/6439/eng-ds-1773266-a-6439081.pdf, ComponentLink5Description=https://datasheet.ciiva.com/6439/eng-ds-1773266-a-6439083.pdf, ComponentLink5URL=https://datasheet.ciiva.com/6439/eng-ds-1773266-a-6439083.pdf, Dimension="3.2 x 1.6 x 1.25mm", Family=RC, Mounting="Surface Mount", Packaging="Tape and Reel", Part No=1625854-1, Pricing 1="1=0.28, 10=0.261, 25=0.224, 50=0.1902, 100=0.1828, 250=0.1641, 500=0.1567, 1000=0.1306 (USD)", RoHS=Yes, Stock 1=31937, Supplier 1=Digi-Key, Temperature Coefficient=N/R, Terminal Pitch=N/R, Termination Style=N/R, Tolerance=N/R
U1: "Imported", Base Part Number=LM5088, Frequency - Switching="50kHz ~ 1MHz", Manufacturer="Texas Instruments", Manufacturer_Part_Number=LM5088MHX-2/NOPB, Manufacturer Part Number=LM5088QMHX-1/NOPB, Operating Temperature="-40°C ~ 125°C (TJ)", Package / Case="16-TSSOP (0.173\", 4.40mm Width) Exposed Pad", Supplier Device Package=16-HTSSOP, Supplier Part Number 1=LM5088QMHX-1/NOPB-ND, Voltage - Supply (Vcc/Vdd)="4.5 V ~ 75 V", Category="Integrated Circuits (ICs)", Clock Sync=Yes, ComponentLink1Description=http://www.ti.com/lit/ds/symlink/lm5088.pdf, ComponentLink1URL=http://www.ti.com/lit/ds/symlink/lm5088.pdf, Control Features="Enable, Frequency Control, Ramp, Soft Start", Duty Cycle (Max)=-, Function=Step-Down, Manufacturer_Name="Texas Instruments", Output Configuration=Positive, Output Phases=1, Output Type="Transistor Driver", Packaging="Tape & Reel (TR)", Part Status=Active, Pricing 1="2500=1.81625 (USD)", RefDes=RefDes, RoHS="RoHS Compliant", Serial Interfaces=-, Stock 1=0, Supplier 1=Digi-Key, Synchronous Rectifier=No, Topology=Buck, TYPE=TYPE, Vendor="Texas Instruments"
U301: Base Part Number=LM1084, Current - Output=5A, Manufacturer="Texas Instruments", Manufacturer Part Number=LM1084ISX-5.0/NOPB, Operating Temperature="-40°C ~ 125°C", Package / Case="TO-263-4, D²Pak (3 Leads + Tab), TO-263AA", Supplier Device Package=DDPAK/TO-263-3, Supplier Part Number 1=LM1084ISX-5.0/NOPBCT-ND, Voltage - Input (Max)=25V, Voltage - Output (Max)=-, Voltage - Output (Min/Fixed)=5V, Voltage Dropout (Max)="1.5V @ 5A", Category="Integrated Circuits (ICs)", ComponentLink1Description=http://www.ti.com/lit/ds/symlink/lm1084.pdf, ComponentLink1URL=http://www.ti.com/lit/ds/symlink/lm1084.pdf, Control Features=-, Mounting Type="Surface Mount", Output Configuration=Positive, Output Type=Fixed, Packaging="Cut Tape (CT)", Part Status=Active, Pricing 1="1=2.73, 10=2.451, 100=1.9701 (USD)", Protection Features="Over Current, Over Temperature", PSRR="68dB (120Hz)", RoHS="RoHS Compliant", Stock 1=431, Supplier 1=Digi-Key

## Via types
v1: diameter 0.5, hole 0.2, Top Layer to Bottom Layer, 9 vias

## Nets (pads, with @x,y where several pads share a name; then routed paths per layer and width w, separated by ;. In a path a pad name is that pad's centre, name@x,y a point inside that pad or via, vN(x,y) a via of type N, cw(c..) or ccw(c..) an arc to the next point about the centre after c; other vN are vias at no path point)
"5V VOUT": C301.1 J301_5V.1 J302_5V.1 J303_5V.1 TP_5V.1 U301.2
24V: C300.1 Cout1.1 Cout2.1 L1.2 Rfbt.1 TP_24V.1 U1.9 U301.3
"56V VIN": Cin.1 J201_56V.1 M1.5 M1.6 M1.7 M1.8 Ruv2.1 U1.1
BOOT: Cboot.1 U1.15
COMP: Ccomp.2 Chf.2 U1.7
COMP_INT: Ccomp.1 Rcomp.2
CS: D1.2 Rsns.1 U1.12
DITH: Cdthr.1 U1.10
EN: Ruv1.1 Ruv2.2 U1.2
FB: Chf.1 Rcomp.1 Rfbb.1 Rfbt.2 U1.8
GND: C300.2 C301.2 Cdthr.2 Cin.2 Cout1.2 Cout2.2 Cramp.2 Css.2 Cvcc.2 J201_56V.2 J202_24V.2 J203_24V.2 J204_24V.2 J301_5V.2 J302_5V.2 J303_5V.2 Rfbb.2 Rsns.2 Rt.2 Ruv1.2 U1.6 U1.11 U1.17 U301.1
  other v1: 25.9,15.9 27,15.9 28.1,15.9 25.9,17 27,17 28.1,17 25.9,18.1 27,18.1 28.1,18.1
HG: M1.4 U1.14
RAMP: Cramp.1 Rramp.2 U1.4
RT: Rt.1 U1.5
SS: Css.1 U1.3
SW: Cboot.2 D1.1 L1.1 M1.1 M1.2 M1.3 U1.13
VCC: Cvcc.1 Rramp.1 U1.16
VOUT: J202_24V.1 J203_24V.1 J204_24V.1
pads on no net: L1.3

## Keep-outs
Keep-Out Layer:
  lines w0.254: 0,0 45,0 45,75 0,75 0,0

## Silkscreen, mask and mechanical layers (free items; w line width, h text height)
Top Overlay:
  circle w3: c5.08,68.58 r1.27
  lines w0.254: 2,2 43,2 43,73 2,73 2,2
  text "Power Board" at 6,4 h2.54 r90
Mechanical 9:
  lines w0.254: 0,0 0,75 45,75 45,0 0,0